# Altium PCB Nexie.PcbDoc
Units mm, origin at the board's own origin, x right, y up, seen from the top; angles counter-clockwise.
Board outline 80 x 40.5 mm, 2 copper layers (Top Layer, Bottom Layer); 28 components, 72 nets, 219 pads, 0 vias.
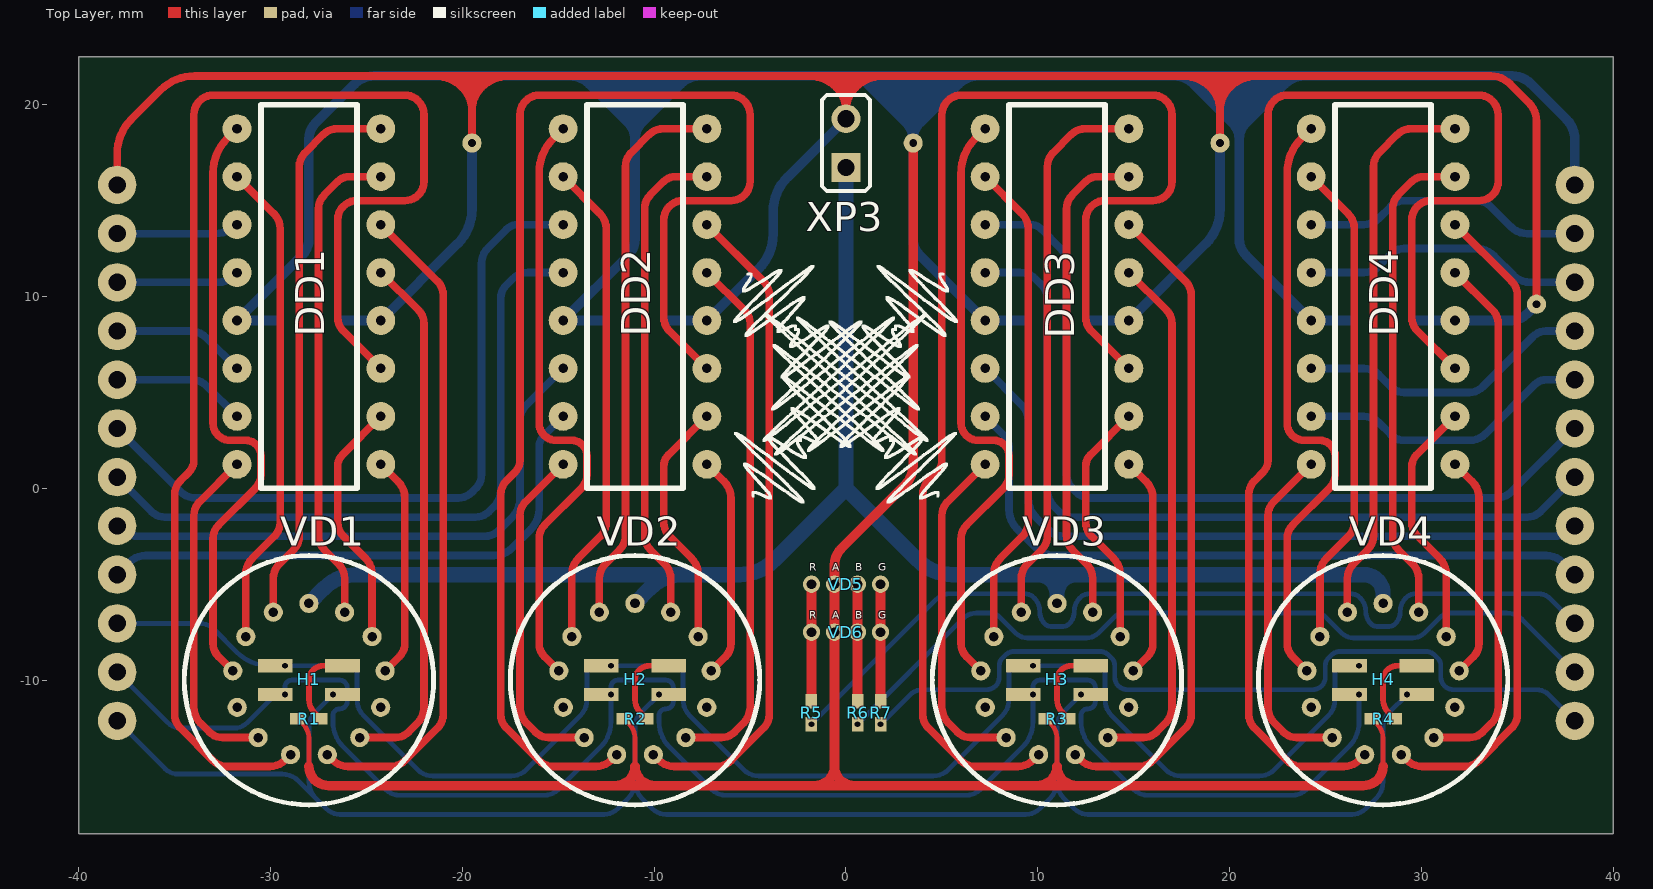
[diagram p0: Top Layer view]
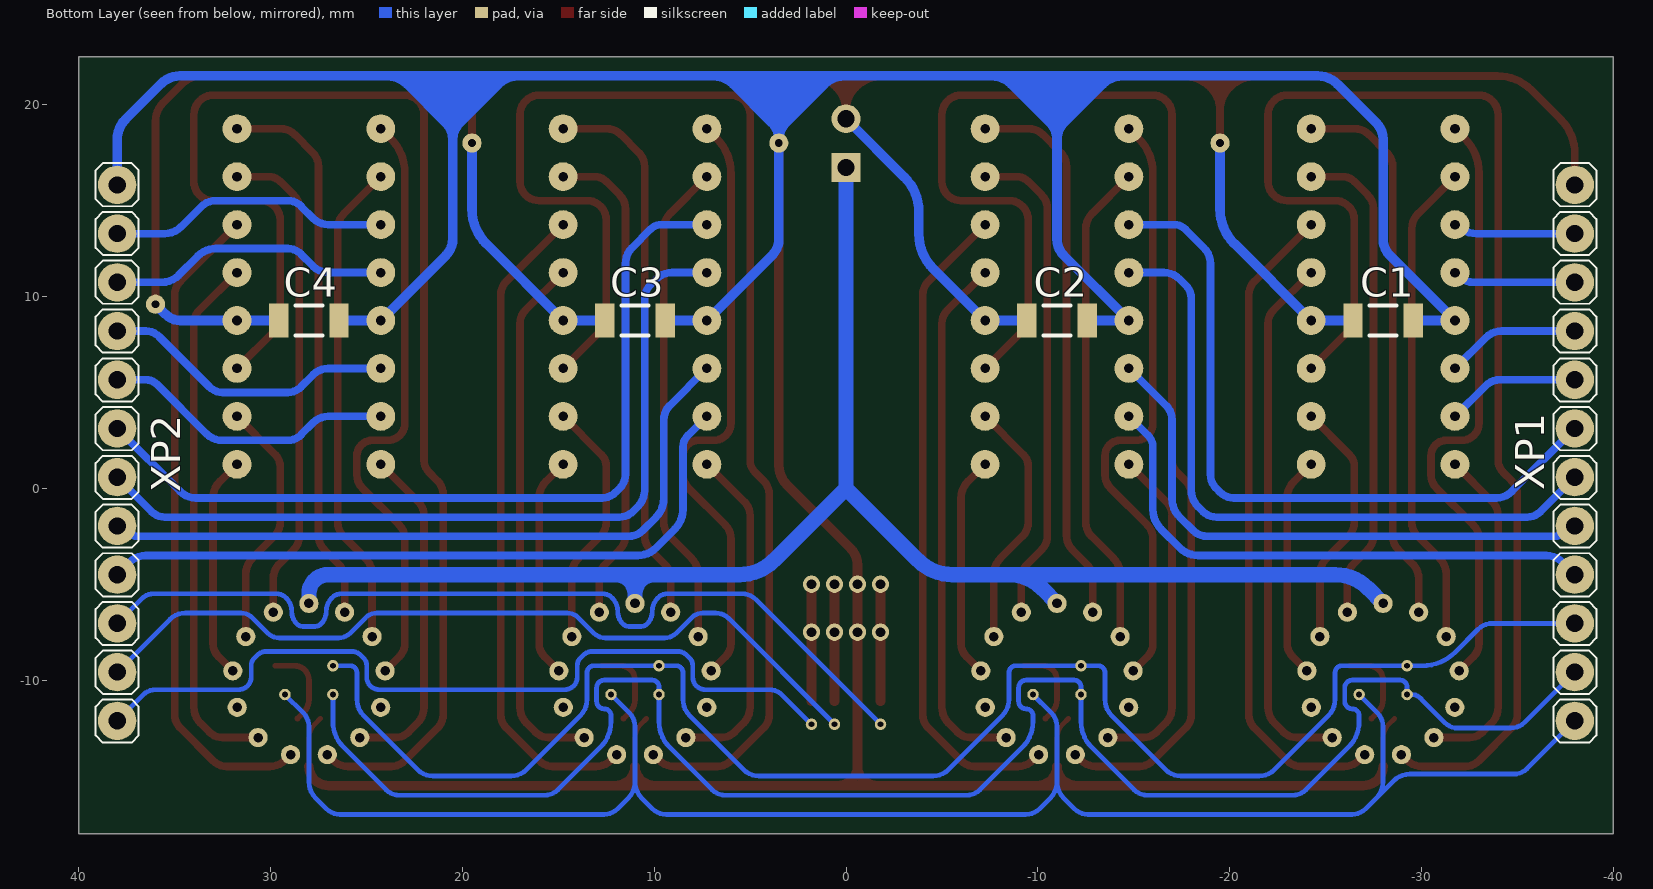
[diagram p1: Bottom Layer view, seen from below]

## Layer stack, top to bottom
Top Solder: solder mask 0.0102, Solder Resist, Dk 3.5
Top Layer: signal copper 0.0356
Dielectric 1: dielectric 0.32, FR-4, Dk 4.8
Bottom Layer: signal copper 0.0356
Bottom Solder: solder mask 0.0102, Solder Resist, Dk 3.5

## Board outline
-40,-18 40,-18 40,22.5 -40,22.5

## Design rules (kind name [scope] priority, off if disabled: settings)
Clearance [All] p1: gap=0.25
ComponentClearance [All] p1: gap=0 collisioncheckmode=3 verticalgap=0 showdistances=FALSE
Height [All] p1: minheight=0 maxheight=100 prefheight=12.7
PolygonConnect [All] p1: connectstyle=Relief reliefconductorwidth=0.254 reliefentries=4 polygonreliefangle="90 Angle" airgapwidth=0.254
RoutingVias [All] p1: holewidth=0.711 width=1.27 viastyle="Through Hole" minholewidth=0.711 minwidth=1.27 maxholewidth=0.711 maxwidth=1.27
SolderMaskExpansion [All] p1: expansion=0.102
Width [All] p1: maxlimit=1 minlimit=0.25 preferedwidth=0.3
27 further rules are at their usual default settings.

## Components (designator, comment, footprint, x,y, rotation, side; value= is the part's Value field where it differs from the comment)
C1 "Cap_0" CAP_1206 -28,8.75 r180 bottom
C2 "Cap_0" CAP_1206 -11,8.75 r180 bottom
C3 "Cap_0" CAP_1206 11,8.75 r180 bottom
C4 "Cap_0" CAP_1206 28,8.75 r180 bottom
DD1 "К155ИД1" К155ИД1 -28,10 r270 top
DD2 "К155ИД1" К155ИД1 -11,10 r270 top
DD3 "К155ИД1" К155ИД1 11,10 r270 top
DD4 "К155ИД1" К155ИД1 28,10 r270 top
H1 "IN-16" IN_16_tube -28,-10 r270 top
H2 "IN-16" IN_16_tube -11,-10 r270 top
H3 "IN-16" IN_16_tube 11,-10 r270 top
H4 "IN-16" IN_16_tube 28,-10 r270 top
R1 "Resistors_0.05W" Resistor_0402 -28,-12 r0 top
R2 "Resistors_0.05W" Resistor_0402 -11,-12 r0 top
R3 "Resistors_0.05W" Resistor_0402 11,-12 r0 top
R4 "Resistors_0.05W" Resistor_0402 28,-12 r0 top
R5 "Resistors_0.05W" Resistor_0402 -1.8,-11.7 r270 top
R6 "Resistors_0.05W" Resistor_0402 0.6,-11.7 r270 top
R7 "Resistors_0.05W" Resistor_0402 1.8,-11.7 r270 top
VD1 "TO-3228BC-MRPBFGF" TO-3228BC-MRPBFGF -28,-10 r0 top
VD2 "TO-3228BC-MRPBFGF" TO-3228BC-MRPBFGF -11,-10 r0 top
VD3 "TO-3228BC-MRPBFGF" TO-3228BC-MRPBFGF 11,-10 r0 top
VD4 "TO-3228BC-MRPBFGF" TO-3228BC-MRPBFGF 28,-10 r0 top
VD5 "BL-L515RGBC" BL-L515RGBC 0,-5 r0 top
VD6 "BL-L515RGBC" BL-L515RGBC 0,-7.5 r0 top
XP1 "PBS_12x1" PBS_12x1 -38,8.2 r270 bottom
XP2 "PBS_12x1" PBS_12x1 38,8.2 r270 bottom
XP3 "PLS2x1" PLS2x1 0,18 r90 top

## Footprints (in the part's own frame and the unit in brackets; to place one, negate y for a bottom-side part, rotate by r counter-clockwise, add the part's x,y. Pads: shape width x height; smd on the part's side, far side on the other; paste and mask are expansions set on the pad)
BL-L515RGBC [mm]
  round 0.9 hole 0.5: 1(1.8,0) 2(0.6,0) 3(-0.6,0) 4(-1.8,0)
  body extent -2.95,-2.95 2.95,2.95, height 12.6
CAP_1206 [mm] "Chip Capacitor, 2-Leads, Body 3,20x1,60mm, IPC Medium Density"
  rect 1x1.75 smd: 1(-1.575,0) 2(1.575,0)
  silkscreen extent -0.7,-0.77 0.7,0.77, body extent -1.63,-0.82 1.63,0.82, height 1.75
IN_16_tube [mm]
  round 1 hole 0.5: 1(-4,0) 2(-3.542,1.859) 3(-2.272,3.292) 4(-0.482,3.971) 5(1.418,3.74) 6(2.994,2.653) 7(3.884,0.957) 8(3.884,-0.957) 9(2.994,-2.653) 10(1.418,-3.74) 11(-0.482,-3.971) 12(-2.272,-3.292) 13(-3.542,-1.859)
  round 1 on Top Overlay: 1(-2.5,0)
  Top Layer region: 0,0 0,0 0,0 0,0
  silkscreen extent -6.5,-6.5 6.5,6.5, body extent -6.75,-6.74 6.75,6.74, height 43
PBS_12x1 [mm]
  round 2 hole 0.9: 1(-7.62,0) 2(-5.08,0) 3(-2.54,0) 4(0,0) 5(2.54,0) 6(5.08,0) 7(7.62,0) 8(10.16,0) 9(12.7,0) 10(15.24,0) 11(17.78,0) 12(20.32,0)
  silkscreen extent -8.75,-1.12 21.45,1.12, body extent -8.89,-1.27 21.59,1.27, height 8.5
PLS2x1 [mm]
  rect 1.5x1.5 hole 0.9: 1(-1.27,0)
  round 1.5 hole 0.9: 2(1.27,0)
  silkscreen extent -2.5,-1.25 2.5,1.25, body extent -2.54,-1.27 2.54,1.27, height 8.44
Resistor_0402 [mm] "Chip Resistor, 2-Leads, Body 1,00x0,50mm, IPC Medium Density"
  rect 0.75x0.6 smd: 1(-0.6,0) 2(0.6,0)
  body extent -0.52,-0.27 0.53,0.26, height 0.35
TO-3228BC-MRPBFGF [mm]
  rect 1.8x0.7 smd: 1(-1.75,0.75) 2(-1.75,-0.75) 3(1.75,-0.75) 4(1.75,0.75)
  round 0.5 on Top Overlay: 4(-0.25,0.75)
  body extent -1.75,-1.4 1.75,1.4, height 2.05
К155ИД1 [mm]
  round 1.5 hole 0.5: 1(-8.75,-3.75) 2(-6.25,-3.75) 3(-3.75,-3.75) 4(-1.25,-3.75) 5(1.25,-3.75) 6(3.75,-3.75) 7(6.25,-3.75) 8(8.75,-3.75) 9(8.75,3.75) 10(6.25,3.75) 11(3.75,3.75) 12(1.25,3.75) 13(-1.25,3.75) 14(-3.75,3.75) 15(-6.25,3.75) 16(-8.75,3.75)
  round 1 on Top Overlay: 1(-8.7,-1.4)
  silkscreen extent -10,-2.5 10,2.5, body extent -10.75,-3.9 10.75,3.9, height 5.31

## Free pads (board coordinates)
  round 0.6 hole 0.3: 0(-29.25,-10.75) 0(-29.25,-9.25) 0(-26.75,-10.75) 0(-12.25,-10.75) 0(-12.25,-9.25) 0(-9.75,-10.75) 0(9.75,-10.75) 0(9.75,-9.25) 0(12.25,-10.75) 0(26.75,-10.75) 0(26.75,-9.25) 0(29.25,-10.75) 2(-1.8,-12.3) 3(0.6,-12.3) 4(1.8,-12.3)
  round 1 hole 0.4: 0(-19.5,18) 0(3.5,18) 0(19.5,18) 0(36,9.6)

## Nets (pads, with @x,y where several pads share a name; then routed paths per layer and width w, separated by ;. In a path a pad name is that pad's centre, name@x,y a point inside that pad or via, vN(x,y) a via of type N, cw(c..) or ccw(c..) an arc to the next point about the centre after c; other vN are vias at no path point)
+5V: C1.2 C2.2 C3.2 C4.2 DD1.5 DD2.5 DD3.5 DD4.5 pad.0@3.5,18 R1.1 R2.1 R3.1 R4.1 VD5.3 VD6.3 XP2.1 | length 265.4
  Top Layer w0.25: R1.1 -28.3,-12.3 cw(c-29.024,-13.024) -28,-13.024 -28,-14.5 ; R2.1 -11.3,-12.3 cw(c-12.024,-13.024) -11,-13.024 -11,-14.5 ; R3.1 10.7,-12.3 cw(c9.976,-13.024) 11,-13.024 11,-14.5 ; R4.1 27.7,-12.3 cw(c26.976,-13.024) 28,-13.024 28,-14.5
  Top Layer w0.5: -28,-14.5 ccw(c-27.034,-14.5) -27.717,-15.183 ccw(c-26.951,-14.417) -26.951,-15.5 26.951,-15.5 ccw(c26.951,-14.417) 27.717,-15.183 ccw(c27.034,-14.5) 28,-14.5 ; -12.049,-15.5 ccw(c-12.049,-14.417) -11.283,-15.183 ccw(c-11.966,-14.5) -11,-14.5 ccw(c-10.034,-14.5) -10.717,-15.183 ccw(c-9.951,-14.417) -9.951,-15.5 ; -1.649,-15.5 ccw(c-1.649,-14.417) -0.883,-15.183 ccw(c-1.566,-14.5) -0.6,-14.5 ; 0.449,-15.5 cw(c0.449,-14.417) -0.317,-15.183 cw(c0.366,-14.5) -0.6,-14.5 ; pad.0@3.5,18 3.5,1.2 cw(c2.051,1.2) 3.076,0.176 -0.25,-3.15 ccw(c0.595,-3.995) -0.6,-3.995 VD5.3 VD6.3 -0.6,-14.5 ; 9.951,-15.5 ccw(c9.951,-14.417) 10.717,-15.183 ccw(c10.034,-14.5) 11,-14.5 ccw(c11.966,-14.5) 11.283,-15.183 ccw(c12.049,-14.417) 12.049,-15.5
  Bottom Layer w0.5: C1.2 DD1.5 -28.354,12.146 ccw(c-29.207,13) -28,13 -28,18.205 cw(c-26.805,18.205) -27.65,19.05 -25.624,21.076 cw(c-24.6,20.051) -24.6,21.5 -7.6,21.5 ; -14.4,21.5 cw(c-14.4,20.051) -13.376,21.076 -11.35,19.05 cw(c-12.195,18.205) -11,18.205 ; C2.2 DD2.5 -11.354,12.146 ccw(c-12.207,13) -11,13 -11,18.205 ; 6.9,21.5 ccw(c6.9,20.051) 5.876,21.076 3.85,19.05 ccw(c4.695,18.205) pad.0@3.5,18.205 ; C3.2 DD3.5 3.854,12.146 cw(c4.707,13) 3.5,13 3.5,18 pad.0@3.5,18.205 ; 23.9,21.5 ccw(c23.9,20.051) 22.876,21.076 20.85,19.05 ccw(c21.695,18.205) 20.5,18.205 ; C4.2 DD4.5 20.854,12.146 cw(c21.707,13) 20.5,13 20.5,18.205 ; XP2.1 38,18.164 ccw(c36.464,18.164) 37.55,19.25 35.7,21.1 ccw(c34.734,20.134) 34.734,21.5 17.103,21.5 ; -11,18.205 cw(c-9.805,18.205) -10.65,19.05 -8.624,21.076 cw(c-7.6,20.051) -7.6,21.5 ; -7.6,21.5 0.1,21.5 ; 0.1,21.5 cw(c0.1,20.051) 1.124,21.076 3.15,19.05 cw(c2.305,18.205) pad.0@3.5,18.205 ; 0.1,21.5 17.103,21.5 ; 17.103,21.5 cw(c17.1,20.051) 18.124,21.076 20.15,19.05 cw(c19.305,18.205) 20.5,18.205
+180V: H1.1@-28,-6 H2.1@-11,-6 H3.1@11,-6 H4.1@28,-6 XP3.1 | length 84.5
  Bottom Layer w0.8: H1.1@-28,-6 -27.207,-5.207 cw(c-25.5,-6.914) -25.5,-4.5 -8.5,-4.5 ; H2.1@-11,-6 -10.207,-5.207 cw(c-8.5,-6.914) -8.5,-4.5 ; XP3.1 0,0 ; H3.1@11,-6 H3.1@11,-5.5 ; 12,-4.5 ccw(c12,-5.5) H3.1@11,-5.5 ; H4.1@28,-6 28,-5.5 ccw(c27,-5.5) 27,-4.5 10,-4.5 ; -8.5,-4.5 -5.552,-4.5 ccw(c-5.552,-1.96) -3.756,-3.756 0,0 ; 0,0 3.756,-3.756 ccw(c5.552,-1.96) 5.552,-4.5 10,-4.5 ; 10,-4.5 cw(c10,-5.5) H3.1@11,-5.5
GND: C1.1 C2.1 C3.1 C4.1 DD1.12 DD2.12 DD3.12 DD4.12 pad.0@19.5,18 pad.0@36,9.6 pad.0@-19.5,18 XP1.1 XP3.2 | length 158.7
  Top Layer w0.4: XP1.1 -38,17.448 cw(c-35.46,17.448) -37.256,19.244 -35.744,20.756 cw(c-33.948,18.96) -33.948,21.5 -21.449,21.5 ; pad.0@-19.5,18 -19.5,19.693 ; XP3.2 XP3.2@0,19.693 ; 1.949,21.5 ccw(c1.949,19.451) 0.5,20.9 ccw(c1.707,19.693) XP3.2@0,19.693 ; pad.0@19.5,18 19.5,19.693 ; pad.0@36,9.6 36,19.134 ccw(c34.634,19.134) 35.6,20.1 34.624,21.076 ccw(c33.6,20.051) 33.6,21.5 21.449,21.5 ; -21.449,21.5 cw(c-21.449,19.451) -20,20.9 cw(c-21.207,19.693) -19.5,19.693 ; -21.449,21.5 -17.551,21.5 ; -19.5,19.693 cw(c-17.793,19.693) -19,20.9 cw(c-17.551,19.451) -17.551,21.5 ; -17.551,21.5 -1.949,21.5 ; -1.949,21.5 cw(c-1.949,19.451) -0.5,20.9 cw(c-1.707,19.693) XP3.2@0,19.693 ; -1.949,21.5 17.551,21.5 ; 17.551,21.5 cw(c17.551,19.451) 19,20.9 cw(c17.793,19.693) 19.5,19.693 ; 17.551,21.5 21.449,21.5 ; 19.5,19.693 cw(c21.207,19.693) 20,20.9 cw(c21.449,19.451) 21.449,21.5
  Bottom Layer w0.5: C1.1 DD1.12 -20.244,12.756 ccw(c-22.04,14.552) -19.5,14.552 pad.0@-19.5,18 ; C2.1 DD2.12 -4.544,11.456 ccw(c-6.34,13.252) -3.8,13.252 -3.8,14.418 cw(c-1.26,14.418) -3.056,16.214 XP3.2 ; C3.1 DD3.12 18.756,12.756 ccw(c16.96,14.552) 19.5,14.552 pad.0@19.5,18 ; C4.1 DD4.12 34.7,8.75 ccw(c34.7,9.836) 35.468,9.068 pad.0@36,9.6
LED_B: pad.0@12.25,-10.75 pad.0@29.25,-10.75 pad.0@-9.75,-10.75 pad.0@-26.75,-10.75 VD1.3 VD2.3 VD3.3 VD4.3 XP1.12 | length 93.4
  Bottom Layer w0.25: XP1.12 -35.52,-14.6 ccw(c-34.796,-13.876) -34.796,-14.9 -29.4,-14.9 cw(c-29.4,-16.107) -28.546,-15.254 -27.646,-16.154 ; pad.0@-26.75,-10.75 -27.7,-11.7 ccw(c-26.976,-12.424) -28,-12.424 -28,-15.3 ccw(c-26.793,-15.3) -27.646,-16.154 ; pad.0@-9.75,-10.75 -10.7,-11.7 ccw(c-9.976,-12.424) -11,-12.424 -11,-15.3 ; pad.0@12.25,-10.75 11.3,-11.7 ccw(c12.024,-12.424) 11,-12.424 11,-15.3 ; pad.0@29.25,-10.75 28.3,-11.7 ccw(c29.024,-12.424) 28,-12.424 28,-15.3 cw(c26.793,-15.3) 27.646,-16.154 27.1,-16.7 cw(c26.376,-15.976) 26.376,-17 12.624,-17 cw(c12.624,-15.976) 11.9,-16.7 11.354,-16.154 cw(c12.207,-15.3) 11,-15.3 ; -27.646,-16.154 -27.1,-16.7 ccw(c-26.376,-15.976) -26.376,-17 -12.624,-17 ccw(c-12.624,-15.976) -11.9,-16.7 -11.354,-16.154 ccw(c-12.207,-15.3) -11,-15.3 ; -11,-15.3 ccw(c-9.793,-15.3) -10.646,-16.154 -10.1,-16.7 ccw(c-9.376,-15.976) -9.376,-17 9.376,-17 ccw(c9.376,-15.976) 10.1,-16.7 10.646,-16.154 ccw(c9.793,-15.3) 11,-15.3
LED_B_T: pad.3 R6.2 XP2.11 | length 42.8
  Bottom Layer w0.25: pad.3 6.117,-6.783 cw(c6.8,-7.466) 6.8,-6.5 7.452,-6.5 cw(c7.452,-7.34) 8.046,-6.746 8.85,-7.55 ccw(c9.454,-6.946) 9.454,-7.8 12.546,-7.8 ccw(c12.546,-6.946) 13.15,-7.55 13.954,-6.746 cw(c14.548,-7.34) 14.548,-6.5 24.452,-6.5 cw(c24.452,-7.34) 25.046,-6.746 25.85,-7.55 ccw(c26.454,-6.946) 26.454,-7.8 29.546,-7.8 ccw(c29.546,-6.946) 30.15,-7.55 30.954,-6.746 cw(c31.548,-7.34) 31.548,-6.5 34.439,-6.5 cw(c34.439,-7.661) 35.26,-6.84 XP2.11
LED_G: pad.0@9.75,-10.75 pad.0@26.75,-10.75 pad.0@-12.25,-10.75 pad.0@-29.25,-10.75 VD1.2 VD2.2 VD3.2 VD4.2 XP1.11 | length 93.7
  Bottom Layer w0.25: XP1.11 -35.39,-12.19 ccw(c-34.642,-11.442) -34.642,-12.5 -31.9,-12.5 ccw(c-31.9,-11.534) -31.217,-12.217 -30.104,-11.104 -29.927,-10.927 cw(c-29.5,-11.354) -29.5,-10.75 -29.25,-10.75 -29.25,-10.35 cw(c-28.9,-10.35) -28.9,-10 -26.4,-10 cw(c-26.4,-10.4) -26,-10.4 -26,-11.1 cw(c-26.4,-11.1) -26.4,-11.5 ccw(c-26.4,-11.85) -26.75,-11.85 -26.75,-12.157 ccw(c-24.836,-12.157) -26.189,-13.511 -24,-15.7 ccw(c-23.276,-14.976) -23.276,-16 -15.724,-16 ccw(c-15.724,-14.976) -15,-15.7 -12.811,-13.511 ccw(c-14.164,-12.157) -12.25,-12.157 -12.25,-10.75 -12.25,-10.35 cw(c-11.9,-10.35) -11.9,-10 -9.4,-10 cw(c-9.4,-10.4) -9,-10.4 -9,-11.1 cw(c-9.4,-11.1) -9.4,-11.5 ccw(c-9.4,-11.85) -9.75,-11.85 -9.75,-12.157 ccw(c-7.836,-12.157) -9.189,-13.511 -7,-15.7 ccw(c-6.276,-14.976) -6.276,-16 6.276,-16 ccw(c6.276,-14.976) 7,-15.7 9.189,-13.511 ccw(c7.836,-12.157) 9.75,-12.157 9.75,-10.75 9.75,-10.35 cw(c10.1,-10.35) 10.1,-10 12.6,-10 cw(c12.6,-10.4) 13,-10.4 13,-11.1 cw(c12.6,-11.1) 12.6,-11.5 ccw(c12.6,-11.85) 12.25,-11.85 12.25,-12.157 ccw(c14.164,-12.157) 12.811,-13.511 15,-15.7 ccw(c15.724,-14.976) 15.724,-16 23.276,-16 ccw(c23.276,-14.976) 24,-15.7 26.189,-13.511 ccw(c24.836,-12.157) 26.75,-12.157 pad.0@26.75,-10.75
LED_G_T: pad.4 R7.2 XP2.12 | length 43
  Bottom Layer w0.25: pad.4 3.317,-10.783 cw(c4,-11.466) 4,-10.5 7.317,-10.5 ccw(c7.317,-9.817) 7.8,-10.3 ccw(c7.341,-9.841) 7.99,-9.841 7.99,-9.236 cw(c8.536,-9.236) 8.15,-8.85 8.3,-8.7 cw(c8.783,-9.183) 8.783,-8.5 13.217,-8.5 cw(c13.217,-9.183) 13.7,-8.7 13.85,-8.85 cw(c13.464,-9.236) 14.01,-9.236 14.01,-9.841 ccw(c14.659,-9.841) 14.2,-10.3 ccw(c14.683,-9.817) 14.683,-10.5 24.317,-10.5 ccw(c24.317,-9.817) 24.8,-10.3 ccw(c24.341,-9.841) 24.99,-9.841 24.99,-9.236 cw(c25.536,-9.236) 25.15,-8.85 25.3,-8.7 cw(c25.783,-9.183) 25.783,-8.5 30.217,-8.5 cw(c30.217,-9.183) 30.7,-8.7 30.85,-8.85 cw(c30.464,-9.236) 31.01,-9.236 31.01,-9.841 ccw(c31.659,-9.841) 31.2,-10.3 ccw(c31.683,-9.817) 31.683,-10.5 36,-10.5 cw(c36,-11.417) 36.649,-10.769 XP2.12
LED_R: pad.0@9.75,-9.25 pad.0@26.75,-9.25 pad.0@-12.25,-9.25 pad.0@-29.25,-9.25 VD1.1 VD2.1 VD3.1 VD4.1 XP1.10 | length 86.2
  Bottom Layer w0.25: XP1.10 -33.7,-7.04 cw(c-33.7,-8.102) -32.949,-7.351 -31.761,-8.539 ccw(c-30.044,-6.821) -30.044,-9.25 -29.25,-9.25 -25.85,-9.25 cw(c-25.85,-9.6) -25.5,-9.6 -25.5,-11 ccw(c-24.293,-11) -25.146,-11.854 -22.326,-14.674 ccw(c-21.539,-13.887) -21.539,-15 -17.461,-15 ccw(c-17.461,-13.887) -16.674,-14.674 -13.854,-11.854 ; -13.853,-11.853 ccw(c-14.707,-11) -13.5,-11 -13.5,-9.6 cw(c-13.15,-9.6) -13.15,-9.25 -12.25,-9.25 -8.85,-9.25 cw(c-8.85,-9.6) -8.5,-9.6 -8.5,-11 ccw(c-7.293,-11) -8.146,-11.854 -5.326,-14.674 ccw(c-4.539,-13.887) -4.539,-15 4.539,-15 ccw(c4.539,-13.887) 5.326,-14.674 8.146,-11.854 ccw(c7.293,-11) 8.5,-11 8.5,-9.6 cw(c8.85,-9.6) 8.85,-9.25 9.75,-9.25 13.15,-9.25 cw(c13.15,-9.6) 13.5,-9.6 13.5,-11 ccw(c14.707,-11) 13.854,-11.854 16.674,-14.674 ccw(c17.461,-13.887) 17.461,-15 21.539,-15 ccw(c21.539,-13.887) 22.326,-14.674 25.146,-11.854 ccw(c24.293,-11) 25.5,-11 25.5,-9.6 cw(c25.85,-9.6) 25.85,-9.25 pad.0@26.75,-9.25
LED_R_T: pad.2 R5.2 XP2.10 | length 47.3
  Bottom Layer w0.25: pad.2 4.717,-5.783 cw(c5.4,-6.466) 5.4,-5.5 9.317,-5.5 cw(c9.317,-6.183) 9.8,-5.7 cw(c9.076,-6.424) 10.1,-6.424 ccw(c11.007,-6.424) 10.366,-7.066 ccw(c10.69,-6.741) 10.69,-7.2 11.31,-7.2 ccw(c11.31,-6.741) 11.634,-7.066 ccw(c10.993,-6.424) 11.9,-6.424 cw(c12.924,-6.424) 12.2,-5.7 cw(c12.683,-6.183) 12.683,-5.5 26.317,-5.5 cw(c26.317,-6.183) 26.8,-5.7 cw(c26.076,-6.424) 27.1,-6.424 ccw(c28.007,-6.424) 27.366,-7.066 ccw(c27.69,-6.741) 27.69,-7.2 28.31,-7.2 ccw(c28.31,-6.741) 28.634,-7.066 ccw(c27.993,-6.424) 28.9,-6.424 cw(c29.924,-6.424) 29.2,-5.7 cw(c29.683,-6.183) 29.683,-5.5 36.1,-5.5 cw(c36.1,-6.369) 36.715,-5.755 XP2.10
NetDD1_1: DD1.1@-31.75,18.75 H1.11 | length 31.8
  Top Layer w0.4: -33,-2.623 -33,-8.1 ccw(c-32.062,-8.1) -32.725,-8.763 H1.11 ; -33,-2.623 cw(c-31.977,-2.623) -32.7,-1.9 -30.783,0.017 ccw(c-31.466,0.7) -30.5,0.7 -30.5,1.7 ccw(c-31.3,1.7) -31.3,2.5 -32.1,2.5 cw(c-32.1,3.4) -33,3.4 -33,16.448 cw(c-30.46,16.448) -32.256,18.244 DD1.1@-31.75,18.75
NetDD1_2: DD1.2 H1.12 | length 25.5
  Top Layer w0.4: DD1.2 -29.826,14.326 cw(c-30.613,13.539) -29.5,13.539 -29.5,-1.774 cw(c-30.529,-1.774) -29.801,-2.501 -30.95,-3.65 ccw(c-30.125,-4.475) -31.292,-4.475 H1.12
NetDD1_8: DD1.8 H1.9 | length 17.7
  Top Layer w0.4: DD1.8 -33.7,-0.7 ccw(c-32.976,-1.424) -34,-1.424 -34,-11.4 ccw(c-32.793,-11.4) -33.646,-12.254 -33.2,-12.7 ccw(c-32.49,-11.99) -32.49,-12.994 H1.9
NetDD1_9: DD1.9 H1.4 | length 11.6
  Top Layer w0.4: DD1.9 -23.354,0.354 cw(c-24.207,-0.5) -23,-0.5 -23,-8.1 cw(c-23.938,-8.1) -23.275,-8.763 H1.4
NetDD1_10: DD1.10 H1.3 | length 13
  Top Layer w0.4: H1.3 -24.708,-4.475 ccw(c-25.875,-4.475) -25.05,-3.65 -26.199,-2.501 cw(c-25.471,-1.774) -26.5,-1.774 -26.5,1.146 cw(c-25.646,1.146) -26.25,1.75 DD1.10
NetDD1_11: DD1.11 H1.8 | length 70.1
  Top Layer w0.4: H1.8 -29.242,-14.169 cw(c-30.042,-13.368) -30.042,-14.5 -32.276,-14.5 cw(c-32.276,-13.476) -33,-14.2 -34.717,-12.483 cw(c-34.034,-11.8) -35,-11.8 -35,-0.327 cw(c-33.969,-0.327) -34.698,0.402 -34.25,0.85 ccw(c-34.854,1.454) -34,1.454 -34,19.476 cw(c-32.976,19.476) -32.976,20.5 -23.024,20.5 cw(c-23.024,19.476) -22,19.476 -22,16 cw(c-23,16) -23,15 -25.5,15 ccw(c-25.5,14) -26.5,14 -26.5,8.9 ccw(c-25.534,8.9) -26.217,8.217 DD1.11
NetDD1_13: DD1.13 H1.6 | length 27.7
  Top Layer w0.4: H1.6 -23.51,-12.994 ccw(c-23.51,-11.99) -22.8,-12.7 -22.354,-12.254 ccw(c-23.207,-11.4) -22,-11.4 -22,8.6 ccw(c-22.966,8.6) -22.283,9.283 DD1.13
NetDD1_14: DD1.14 H1.7 | length 34.4
  Top Layer w0.4: H1.7 -26.758,-14.169 ccw(c-25.958,-13.368) -25.958,-14.5 -23.724,-14.5 ccw(c-23.724,-13.476) -23,-14.2 -21.283,-12.483 ccw(c-21.966,-11.8) -21,-11.8 -21,10.076 ccw(c-22.024,10.076) -21.3,10.8 DD1.14
NetDD1_15: DD1.15 H1.2 | length 25.6
  Top Layer w0.4: H1.2 -26.141,-4.696 ccw(c-27.196,-4.696) -26.45,-3.95 -27.2,-3.2 cw(c-26.476,-2.476) -27.5,-2.476 -27.5,14.576 cw(c-26.476,14.576) -27.2,15.3 -26.5,16 cw(c-25.896,15.396) -25.896,16.25 DD1.15
NetDD1_16: DD1.16 H1.13 | length 28.9
  Top Layer w0.4: H1.13 -29.859,-4.696 cw(c-28.804,-4.696) -29.55,-3.95 -28.8,-3.2 ccw(c-29.524,-2.476) -28.5,-2.476 -28.5,16.776 cw(c-27.476,16.776) -28.2,17.5 -27.25,18.45 cw(c-26.526,17.726) -26.526,18.75 DD1.16
NetDD2_1: DD2.1@-14.75,18.75 H2.11 | length 31.8
  Top Layer w0.4: -16,-2.623 -16,-8.1 ccw(c-15.062,-8.1) -15.725,-8.763 H2.11 ; -16,-2.623 cw(c-14.977,-2.623) -15.7,-1.9 -13.783,0.017 ccw(c-14.466,0.7) -13.5,0.7 -13.5,1.7 ccw(c-14.3,1.7) -14.3,2.5 -15.1,2.5 cw(c-15.1,3.4) -16,3.4 -16,16.448 cw(c-13.46,16.448) -15.256,18.244 DD2.1@-14.75,18.75
NetDD2_2: DD2.2 H2.12 | length 25.5
  Top Layer w0.4: DD2.2 -12.826,14.326 cw(c-13.613,13.539) -12.5,13.539 -12.5,-1.774 cw(c-13.529,-1.774) -12.801,-2.501 -13.95,-3.65 ccw(c-13.125,-4.475) -14.292,-4.475 H2.12
NetDD2_8: DD2.8 H2.9 | length 17.7
  Top Layer w0.4: DD2.8 -16.7,-0.7 ccw(c-15.976,-1.424) -17,-1.424 -17,-11.4 ccw(c-15.793,-11.4) -16.646,-12.254 -16.2,-12.7 ccw(c-15.49,-11.99) -15.49,-12.994 H2.9
NetDD2_9: DD2.9 H2.4 | length 11.6
  Top Layer w0.4: DD2.9 -6.354,0.354 cw(c-7.207,-0.5) -6,-0.5 -6,-8.1 cw(c-6.938,-8.1) -6.275,-8.763 H2.4
NetDD2_10: DD2.10 H2.3 | length 13
  Top Layer w0.4: H2.3 -7.708,-4.475 ccw(c-8.875,-4.475) -8.05,-3.65 -9.199,-2.501 cw(c-8.471,-1.774) -9.5,-1.774 -9.5,1.146 cw(c-8.646,1.146) -9.25,1.75 DD2.10
NetDD2_11: DD2.11 H2.8 | length 69.6
  Top Layer w0.4: H2.8@-12.242,-14.169 cw(c-13.042,-13.368) -13.042,-14.5 -15.276,-14.5 cw(c-15.276,-13.476) -16,-14.2 -17.717,-12.483 cw(c-17.034,-11.8) -18,-11.8 -18,-0.327 cw(c-16.969,-0.327) -17.698,0.402 -17.25,0.85 ccw(c-17.854,1.454) -17,1.454 -17,19.476 cw(c-15.976,19.476) -15.976,20.5 -6.024,20.5 cw(c-6.024,19.476) -5,19.476 -5,16 cw(c-6,16) -6,15 -8.5,15 ccw(c-8.5,14) -9.5,14 -9.5,8.9 ccw(c-8.534,8.9) -9.217,8.217 DD2.11
NetDD2_13: DD2.13 H2.6 | length 27.7
  Top Layer w0.4: H2.6 -6.51,-12.994 ccw(c-6.51,-11.99) -5.8,-12.7 -5.354,-12.254 ccw(c-6.207,-11.4) -5,-11.4 -5,8.6 ccw(c-5.966,8.6) -5.283,9.283 DD2.13
NetDD2_14: DD2.14 H2.7 | length 34.4
  Top Layer w0.4: H2.7 -9.758,-14.169 ccw(c-8.958,-13.368) -8.958,-14.5 -6.724,-14.5 ccw(c-6.724,-13.476) -6,-14.2 -4.283,-12.483 ccw(c-4.966,-11.8) -4,-11.8 -4,10.076 ccw(c-5.024,10.076) -4.3,10.8 DD2.14
NetDD2_15: DD2.15 H2.2 | length 25.6
  Top Layer w0.4: H2.2 -9.141,-4.696 ccw(c-10.196,-4.696) -9.45,-3.95 -10.2,-3.2 cw(c-9.476,-2.476) -10.5,-2.476 -10.5,14.576 cw(c-9.476,14.576) -10.2,15.3 -9.5,16 cw(c-8.896,15.396) -8.896,16.25 DD2.15
NetDD2_16: DD2.16 H2.13 | length 28.9
  Top Layer w0.4: H2.13 -12.859,-4.696 cw(c-11.804,-4.696) -12.55,-3.95 -11.8,-3.2 ccw(c-12.524,-2.476) -11.5,-2.476 -11.5,16.776 cw(c-10.476,16.776) -11.2,17.5 -10.25,18.45 cw(c-9.526,17.726) -9.526,18.75 DD2.16
NetDD3_1: DD3.1@7.25,18.75 H3.11 | length 31.8
  Top Layer w0.4: H3.11 6.275,-8.763 cw(c6.938,-8.1) 6,-8.1 6,-2.623 cw(c7.023,-2.623) 6.3,-1.9 8.217,0.017 ccw(c7.534,0.7) 8.5,0.7 8.5,1.7 ccw(c7.7,1.7) 7.7,2.5 6.9,2.5 cw(c6.9,3.4) 6,3.4 6,16.448 cw(c8.54,16.448) 6.744,18.244 DD3.1@7.25,18.75
NetDD3_2: DD3.2 H3.12 | length 25.5
  Top Layer w0.4: DD3.2 9.174,14.326 cw(c8.387,13.539) 9.5,13.539 9.5,-1.774 cw(c8.471,-1.774) 9.199,-2.501 8.05,-3.65 ccw(c8.875,-4.475) 7.708,-4.475 H3.12
NetDD3_8: DD3.8 H3.9 | length 17.7
  Top Layer w0.4: DD3.8 5.3,-0.7 ccw(c6.024,-1.424) 5,-1.424 5,-11.4 ccw(c6.207,-11.4) 5.354,-12.254 5.8,-12.7 ccw(c6.51,-11.99) 6.51,-12.994 H3.9
NetDD3_9: DD3.9 H3.4 | length 11.6
  Top Layer w0.4: DD3.9 15.646,0.354 cw(c14.793,-0.5) 16,-0.5 16,-8.1 cw(c15.062,-8.1) 15.725,-8.763 H3.4
NetDD3_10: DD3.10 H3.3 | length 13
  Top Layer w0.4: H3.3 14.292,-4.475 ccw(c13.125,-4.475) 13.95,-3.65 12.801,-2.501 cw(c13.529,-1.774) 12.5,-1.774 12.5,1.146 cw(c13.354,1.146) 12.75,1.75 DD3.10
NetDD3_11: DD3.11 H3.8 | length 70.1
  Top Layer w0.4: H3.8 9.758,-14.169 cw(c8.958,-13.368) 8.958,-14.5 6.724,-14.5 cw(c6.724,-13.476) 6,-14.2 4.283,-12.483 cw(c4.966,-11.8) 4,-11.8 4,-0.327 cw(c5.031,-0.327) 4.302,0.402 4.75,0.85 ccw(c4.146,1.454) 5,1.454 5,19.476 cw(c6.024,19.476) 6.024,20.5 15.976,20.5 cw(c15.976,19.476) 17,19.476 17,16 cw(c16,16) 16,15 13.5,15 ccw(c13.5,14) 12.5,14 12.5,8.9 ccw(c13.466,8.9) 12.783,8.217 DD3.11
NetDD3_13: DD3.13 H3.6 | length 27.7
  Top Layer w0.4: H3.6 15.49,-12.994 ccw(c15.49,-11.99) 16.2,-12.7 16.646,-12.254 ccw(c15.793,-11.4) 17,-11.4 17,8.6 ccw(c16.034,8.6) 16.717,9.283 DD3.13
NetDD3_14: DD3.14 H3.7 | length 34.4
  Top Layer w0.4: H3.7 12.242,-14.169 ccw(c13.042,-13.368) 13.042,-14.5 15.276,-14.5 ccw(c15.276,-13.476) 16,-14.2 17.717,-12.483 ccw(c17.034,-11.8) 18,-11.8 18,10.076 ccw(c16.976,10.076) 17.7,10.8 DD3.14
NetDD3_15: DD3.15 H3.2 | length 25.6
  Top Layer w0.4: H3.2 12.859,-4.696 ccw(c11.804,-4.696) 12.55,-3.95 11.8,-3.2 cw(c12.524,-2.476) 11.5,-2.476 11.5,14.576 cw(c12.524,14.576) 11.8,15.3 12.5,16 cw(c13.104,15.396) 13.104,16.25 DD3.15
NetDD3_16: DD3.16 H3.13 | length 28.9
  Top Layer w0.4: H3.13 9.141,-4.696 cw(c10.196,-4.696) 9.45,-3.95 10.2,-3.2 ccw(c9.476,-2.476) 10.5,-2.476 10.5,16.776 cw(c11.524,16.776) 10.8,17.5 11.75,18.45 cw(c12.474,17.726) 12.474,18.75 DD3.16
NetDD4_1: DD4.1@24.25,18.75 H4.11 | length 31.8
  Top Layer w0.4: H4.11 23.275,-8.763 cw(c23.938,-8.1) 23,-8.1 23,-2.623 cw(c24.023,-2.623) 23.3,-1.9 25.217,0.017 ccw(c24.534,0.7) 25.5,0.7 25.5,1.7 ccw(c24.7,1.7) 24.7,2.5 23.9,2.5 cw(c23.9,3.4) 23,3.4 23,16.448 cw(c25.54,16.448) 23.744,18.244 DD4.1@24.25,18.75
NetDD4_2: DD4.2 H4.12 | length 25.5
  Top Layer w0.4: DD4.2 26.174,14.326 cw(c25.387,13.539) 26.5,13.539 26.5,-1.774 cw(c25.471,-1.774) 26.199,-2.501 25.05,-3.65 ccw(c25.875,-4.475) 24.708,-4.475 H4.12
NetDD4_8: DD4.8 H4.9 | length 17.7
  Top Layer w0.4: DD4.8 22.3,-0.7 ccw(c23.024,-1.424) 22,-1.424 22,-11.4 ccw(c23.207,-11.4) 22.354,-12.254 22.8,-12.7 ccw(c23.51,-11.99) 23.51,-12.994 H4.9
NetDD4_9: DD4.9 H4.4 | length 11.6
  Top Layer w0.4: DD4.9 32.646,0.354 cw(c31.793,-0.5) 33,-0.5 33,-8.1 cw(c32.062,-8.1) 32.725,-8.763 H4.4
NetDD4_10: DD4.10 H4.3 | length 13
  Top Layer w0.4: H4.3 31.292,-4.475 ccw(c30.125,-4.475) 30.95,-3.65 29.801,-2.501 cw(c30.529,-1.774) 29.5,-1.774 29.5,1.146 cw(c30.354,1.146) 29.75,1.75 DD4.10
NetDD4_11: DD4.11 H4.8 | length 70.1
  Top Layer w0.4: H4.8 26.758,-14.169 cw(c25.958,-13.368) 25.958,-14.5 23.724,-14.5 cw(c23.724,-13.476) 23,-14.2 21.283,-12.483 cw(c21.966,-11.8) 21,-11.8 21,-0.327 cw(c22.031,-0.327) 21.302,0.402 21.75,0.85 ccw(c21.146,1.454) 22,1.454 22,19.476 cw(c23.024,19.476) 23.024,20.5 32.976,20.5 cw(c32.976,19.476) 34,19.476 34,16 cw(c33,16) 33,15 30.5,15 ccw(c30.5,14) 29.5,14 29.5,8.9 ccw(c30.466,8.9) 29.783,8.217 DD4.11
NetDD4_13: DD4.13 H4.6 | length 27.7
  Top Layer w0.4: H4.6 32.49,-12.994 ccw(c32.49,-11.99) 33.2,-12.7 33.646,-12.254 ccw(c32.793,-11.4) 34,-11.4 34,8.6 ccw(c33.034,8.6) 33.717,9.283 DD4.13
NetDD4_14: DD4.14 H4.7 | length 34.4
  Top Layer w0.4: H4.7 29.242,-14.169 ccw(c30.042,-13.368) 30.042,-14.5 32.276,-14.5 ccw(c32.276,-13.476) 33,-14.2 34.717,-12.483 ccw(c34.034,-11.8) 35,-11.8 35,10.076 ccw(c33.976,10.076) 34.7,10.8 DD4.14
NetDD4_15: DD4.15 H4.2 | length 25.6
  Top Layer w0.4: H4.2 29.859,-4.696 ccw(c28.804,-4.696) 29.55,-3.95 28.8,-3.2 cw(c29.524,-2.476) 28.5,-2.476 28.5,14.576 cw(c29.524,14.576) 28.8,15.3 29.5,16 cw(c30.104,15.396) 30.104,16.25 DD4.15
NetDD4_16: DD4.16 H4.13 | length 28.9
  Top Layer w0.4: H4.13 26.141,-4.696 cw(c27.196,-4.696) 26.45,-3.95 27.2,-3.2 ccw(c26.476,-2.476) 27.5,-2.476 27.5,16.776 cw(c28.524,16.776) 27.8,17.5 28.75,18.45 cw(c29.474,17.726) 29.474,18.75 DD4.16
NetR1_2: R1.2 VD1.4@-26.25,-9.25 | length 4.4
  Top Layer w0.3: R1.2 -27.717,-11.683 cw(c-27.034,-11) -28,-11 -28,-10 cw(c-27.25,-10) -27.25,-9.25 VD1.4@-26.25,-9.25
NetR2_2: R2.2 VD2.4@-9.25,-9.25 | length 4.4
  Top Layer w0.3: R2.2 -10.717,-11.683 cw(c-10.034,-11) -11,-11 -11,-10 cw(c-10.25,-10) -10.25,-9.25 VD2.4@-9.25,-9.25
NetR3_2: R3.2 VD3.4@12.75,-9.25 | length 4.4
  Top Layer w0.3: R3.2 11.283,-11.683 cw(c11.966,-11) 11,-11 11,-10 cw(c11.75,-10) 11.75,-9.25 VD3.4@12.75,-9.25
NetR4_2: R4.2 VD4.4@29.75,-9.25 | length 4.4
  Top Layer w0.3: R4.2 28.283,-11.683 cw(c28.966,-11) 28,-11 28,-10 cw(c28.75,-10) 28.75,-9.25 VD4.4@29.75,-9.25
NetR5_1: R5.1 VD5.4 VD6.4 | length 6.1
  Top Layer w0.5: R5.1 VD5.4
NetR6_1: R6.1 VD5.2 VD6.2 | length 6.1
  Top Layer w0.5: R6.1 VD6.2 VD5.2
NetR7_1: R7.1 VD5.1 VD6.1 | length 6.1
  Top Layer w0.5: R7.1 VD5.1
T1_A0: DD1.3 XP1.2 | length 6.4
  Bottom Layer w0.4: XP1.2 -32.885,13.28 ccw(c-32.885,14.885) DD1.3
T1_A1: DD1.6 XP1.4 | length 7
  Bottom Layer w0.4: XP1.4 -34.2,8.2 cw(c-34.2,6.993) -33.346,7.846 DD1.6
T1_A2: DD1.7 XP1.5 | length 7
  Bottom Layer w0.4: XP1.5 -34.1,5.66 cw(c-34.1,4.598) -33.349,5.349 DD1.7
T1_A3: DD1.4 XP1.3 | length 6.4
  Bottom Layer w0.4: XP1.3 -32.7,10.74 ccw(c-32.7,11.802) -31.949,11.051 DD1.4
T2_A0: DD2.3 XP1.6 | length 37.4
  Bottom Layer w0.4: XP1.6 -34.719,-0.161 ccw(c-33.9,0.659) -33.9,-0.5 -20.224,-0.5 ccw(c-20.224,0.524) -19.5,-0.2 -19.3,0 ccw(c-20.024,0.724) -19,0.724 -19,11.705 cw(c-17.805,11.705) -18.65,12.55 -17.697,13.503 cw(c-17.1,12.905) -17.1,13.75 DD2.3
T2_A1: DD2.6 XP1.8 | length 29.9
  Bottom Layer w0.4: XP1.8 -37.856,-2.104 ccw(c-36.9,-1.148) -36.9,-2.5 -18.824,-2.5 ccw(c-18.824,-1.476) -18.1,-2.2 -17.4,-1.5 ccw(c-18.366,-0.534) -17,-0.534 -17,3.574 cw(c-15.971,3.574) -16.699,4.301 DD2.6
T2_A2: DD2.7 XP1.9 | length 28.9
  Bottom Layer w0.4: XP1.9 XP1.9@-37.354,-3.854 ; XP1.9@-37.353,-3.853 cw(c-36.5,-4.707) -36.5,-3.5 -18.368,-3.5 ccw(c-18.368,-2.129) -17.398,-3.098 -16.424,-2.124 ccw(c-17.449,-1.1) -16,-1.1 -16,2.146 cw(c-15.146,2.146) -15.75,2.75 DD2.7
T2_A3: DD2.4 XP1.7 | length 35.5
  Bottom Layer w0.4: XP1.7 -36.217,-1.203 ccw(c-35.5,-0.486) -35.5,-1.5 -19.324,-1.5 ccw(c-19.324,-0.476) -18.6,-1.2 -18.354,-0.954 ccw(c-19.207,-0.1) -18,-0.1 -18,9.9 cw(c-17.034,9.9) -17.717,10.583 -17.4,10.9 cw(c-16.555,10.055) -16.555,11.25 DD2.4
T3_A0: DD3.3 XP2.6 | length 44.9
  Bottom Layer w0.4: DD3.3 9.6,13.75 cw(c9.6,12.905) 10.197,13.503 11.15,12.55 cw(c10.305,11.705) 11.5,11.705 11.5,0.724 ccw(c12.524,0.724) 11.8,0 12,-0.2 ccw(c12.724,0.524) 12.724,-0.5 33.9,-0.5 ccw(c33.9,0.659) 34.719,-0.161 XP2.6
T3_A1: DD3.6 XP2.8 | length 37.4
  Bottom Layer w0.4: DD3.6 9.199,4.301 cw(c8.471,3.574) 9.5,3.574 9.5,-0.534 ccw(c10.866,-0.534) 9.9,-1.5 10.6,-2.2 ccw(c11.324,-1.476) 11.324,-2.5 36.9,-2.5 ccw(c36.9,-1.148) 37.856,-2.104 XP2.8
T3_A2: DD3.7 XP2.9 | length 36.4
  Bottom Layer w0.4: DD3.7 8.25,2.75 cw(c7.646,2.146) 8.5,2.146 8.5,-1.1 ccw(c9.949,-1.1) 8.924,-2.124 9.898,-3.098 ccw(c10.868,-2.129) 10.868,-3.5 36.5,-3.5 cw(c36.5,-4.707) 37.354,-3.854 XP2.9
T3_A3: DD3.4 XP2.7 | length 43
  Bottom Layer w0.4: DD3.4 9.055,11.25 cw(c9.055,10.055) 9.9,10.9 10.217,10.583 cw(c9.534,9.9) 10.5,9.9 10.5,-0.1 ccw(c11.707,-0.1) 10.854,-0.954 11.1,-1.2 ccw(c11.824,-0.476) 11.824,-1.5 35.5,-1.5 ccw(c35.5,-0.486) 36.217,-1.203 XP2.7
T4_A0: DD4.3 XP2.2 | length 14.8
  Bottom Layer w0.4: DD4.3 27,13.75 ccw(c27,14.836) 27.768,14.068 28.417,14.717 cw(c29.1,14.034) 29.1,15 32.846,15 cw(c32.846,13.905) 33.621,14.679 34.659,13.641 ccw(c35.53,14.512) 35.53,13.28 XP2.2
T4_A1: DD4.6 XP2.4 | length 15.4
  Bottom Layer w0.4: DD4.6 27,6.25 cw(c27,5.164) 27.768,5.932 28.417,5.283 ccw(c29.1,5.966) 29.1,5 32.5,5 ccw(c32.5,5.966) 33.183,5.283 35.817,7.917 cw(c36.5,7.234) 36.5,8.2 XP2.4
T4_A2: DD4.7 XP2.5 | length 15.4
  Bottom Layer w0.4: DD4.7 27,3.75 cw(c27,2.664) 27.768,3.432 28.417,2.783 ccw(c29.1,3.466) 29.1,2.5 32.5,2.5 ccw(c32.5,3.707) 33.353,2.853 ; 33.354,2.854 35.92,5.42 cw(c36.5,4.839) 36.5,5.66 XP2.5
T4_A3: DD4.4 XP2.3 | length 14.8
  Bottom Layer w0.4: DD4.4 27,11.25 ccw(c27,12.336) 27.768,11.568 28.417,12.217 cw(c29.1,11.534) 29.1,12.5 32.846,12.5 cw(c32.846,11.164) 33.791,12.109 34.8,11.1 ccw(c35.669,11.969) 35.669,10.74 XP2.3
pads on no net: DD1.1@-29.4,18.7 DD2.1@-12.4,18.7 DD3.1@9.6,18.7 DD4.1@26.6,18.7 H1.1@-28,-7.5 H1.5 H1.10 H2.1@-11,-7.5 H2.5 H2.10 H3.1@11,-7.5 H3.5 H3.10 H4.1@28,-7.5 H4.5 H4.10 VD1.4@-28.25,-9.25 VD2.4@-11.25,-9.25 VD3.4@10.75,-9.25 VD4.4@27.75,-9.25

## Other copper
Top Layer:
  region net GND: -1.666,21.5 cw(c-1.666,20.134) -0.7,21.1 -0.171,20.571 cw(c-0.341,20.4) -0.1,20.4 -0.1,20.341 ccw(c0.241,20.341) 0,20.1 ccw(c-0.483,20.583) 0.2,20.583 0.2,20.7 ccw(c0.2,21.183) 0.541,20.841 1.2,21.5
  region net GND: -20.9,21.5 cw(c-20.9,20.776) -20.388,21.288 -19.854,20.754 cw(c-20.707,19.9) -19.5,19.9 cw(c-18.293,19.9) -19.146,20.754 -18.4,21.5
  region net GND: 18.3,21.5 cw(c18.3,21.259) 18.471,21.429 19.288,20.612 cw(c18.776,20.1) 19.5,20.1 cw(c20.224,20.1) 19.712,20.612 20.529,21.429 cw(c20.7,21.259) 20.7,21.5
Bottom Layer:
  region net +5V: 23.3,21.5 20.5,18.7 17.841,21.359 ccw(c17.5,21.017) 17.5,21.5
  region net +5V: 6.3,21.5 3.5,18.7 0.841,21.359 ccw(c0.5,21.017) 0.5,21.5
  region net +5V: -8.2,21.5 -11,18.7 -13.659,21.359 ccw(c-14,21.017) -14,21.5

## Silkscreen, mask and mechanical layers (free items; w line width, h text height)
Top Overlay:
  drawing of 5656 lines, arcs and shapes, not listed
Mechanical 15:
  lines w0.2: -1.25,0 1.25,0 ; 0,-1.25 0,1.25 ; -40,-18 -40,22.5 40,22.5 40,-18 -40,-18

## Text inside footprints (layer, text, board x,y; h text height)
VD5: Top Overlay "R" at -1.925,-4.3 h0.4; Top Overlay "A" at -0.725,-4.3 h0.4; Top Overlay "B" at 0.475,-4.3 h0.4; Top Overlay "G" at 1.675,-4.3 h0.4
VD6: Top Overlay "R" at -1.925,-6.8 h0.4; Top Overlay "A" at -0.725,-6.8 h0.4; Top Overlay "B" at 0.475,-6.8 h0.4; Top Overlay "G" at 1.675,-6.8 h0.4